# Altium PCB ART_CARD Rev 5.PcbDoc (part 2 of 13)
Units mil, origin at the board's own origin, x right, y up, seen from the top; angles counter-clockwise.
Board outline 6600.39 x 3903.54 mil, 8 copper layers (Top, Inner Layer 2, Inner Layer 3, Inner Layer 4, Inner Layer 5, Inner Layer 6, Inner Layer 7, Bottom), stack 63.111 mil thick; 542 components, 382 nets, 2410 pads, 1433 vias.
Unrouted connection lines stored in the file: 1247.
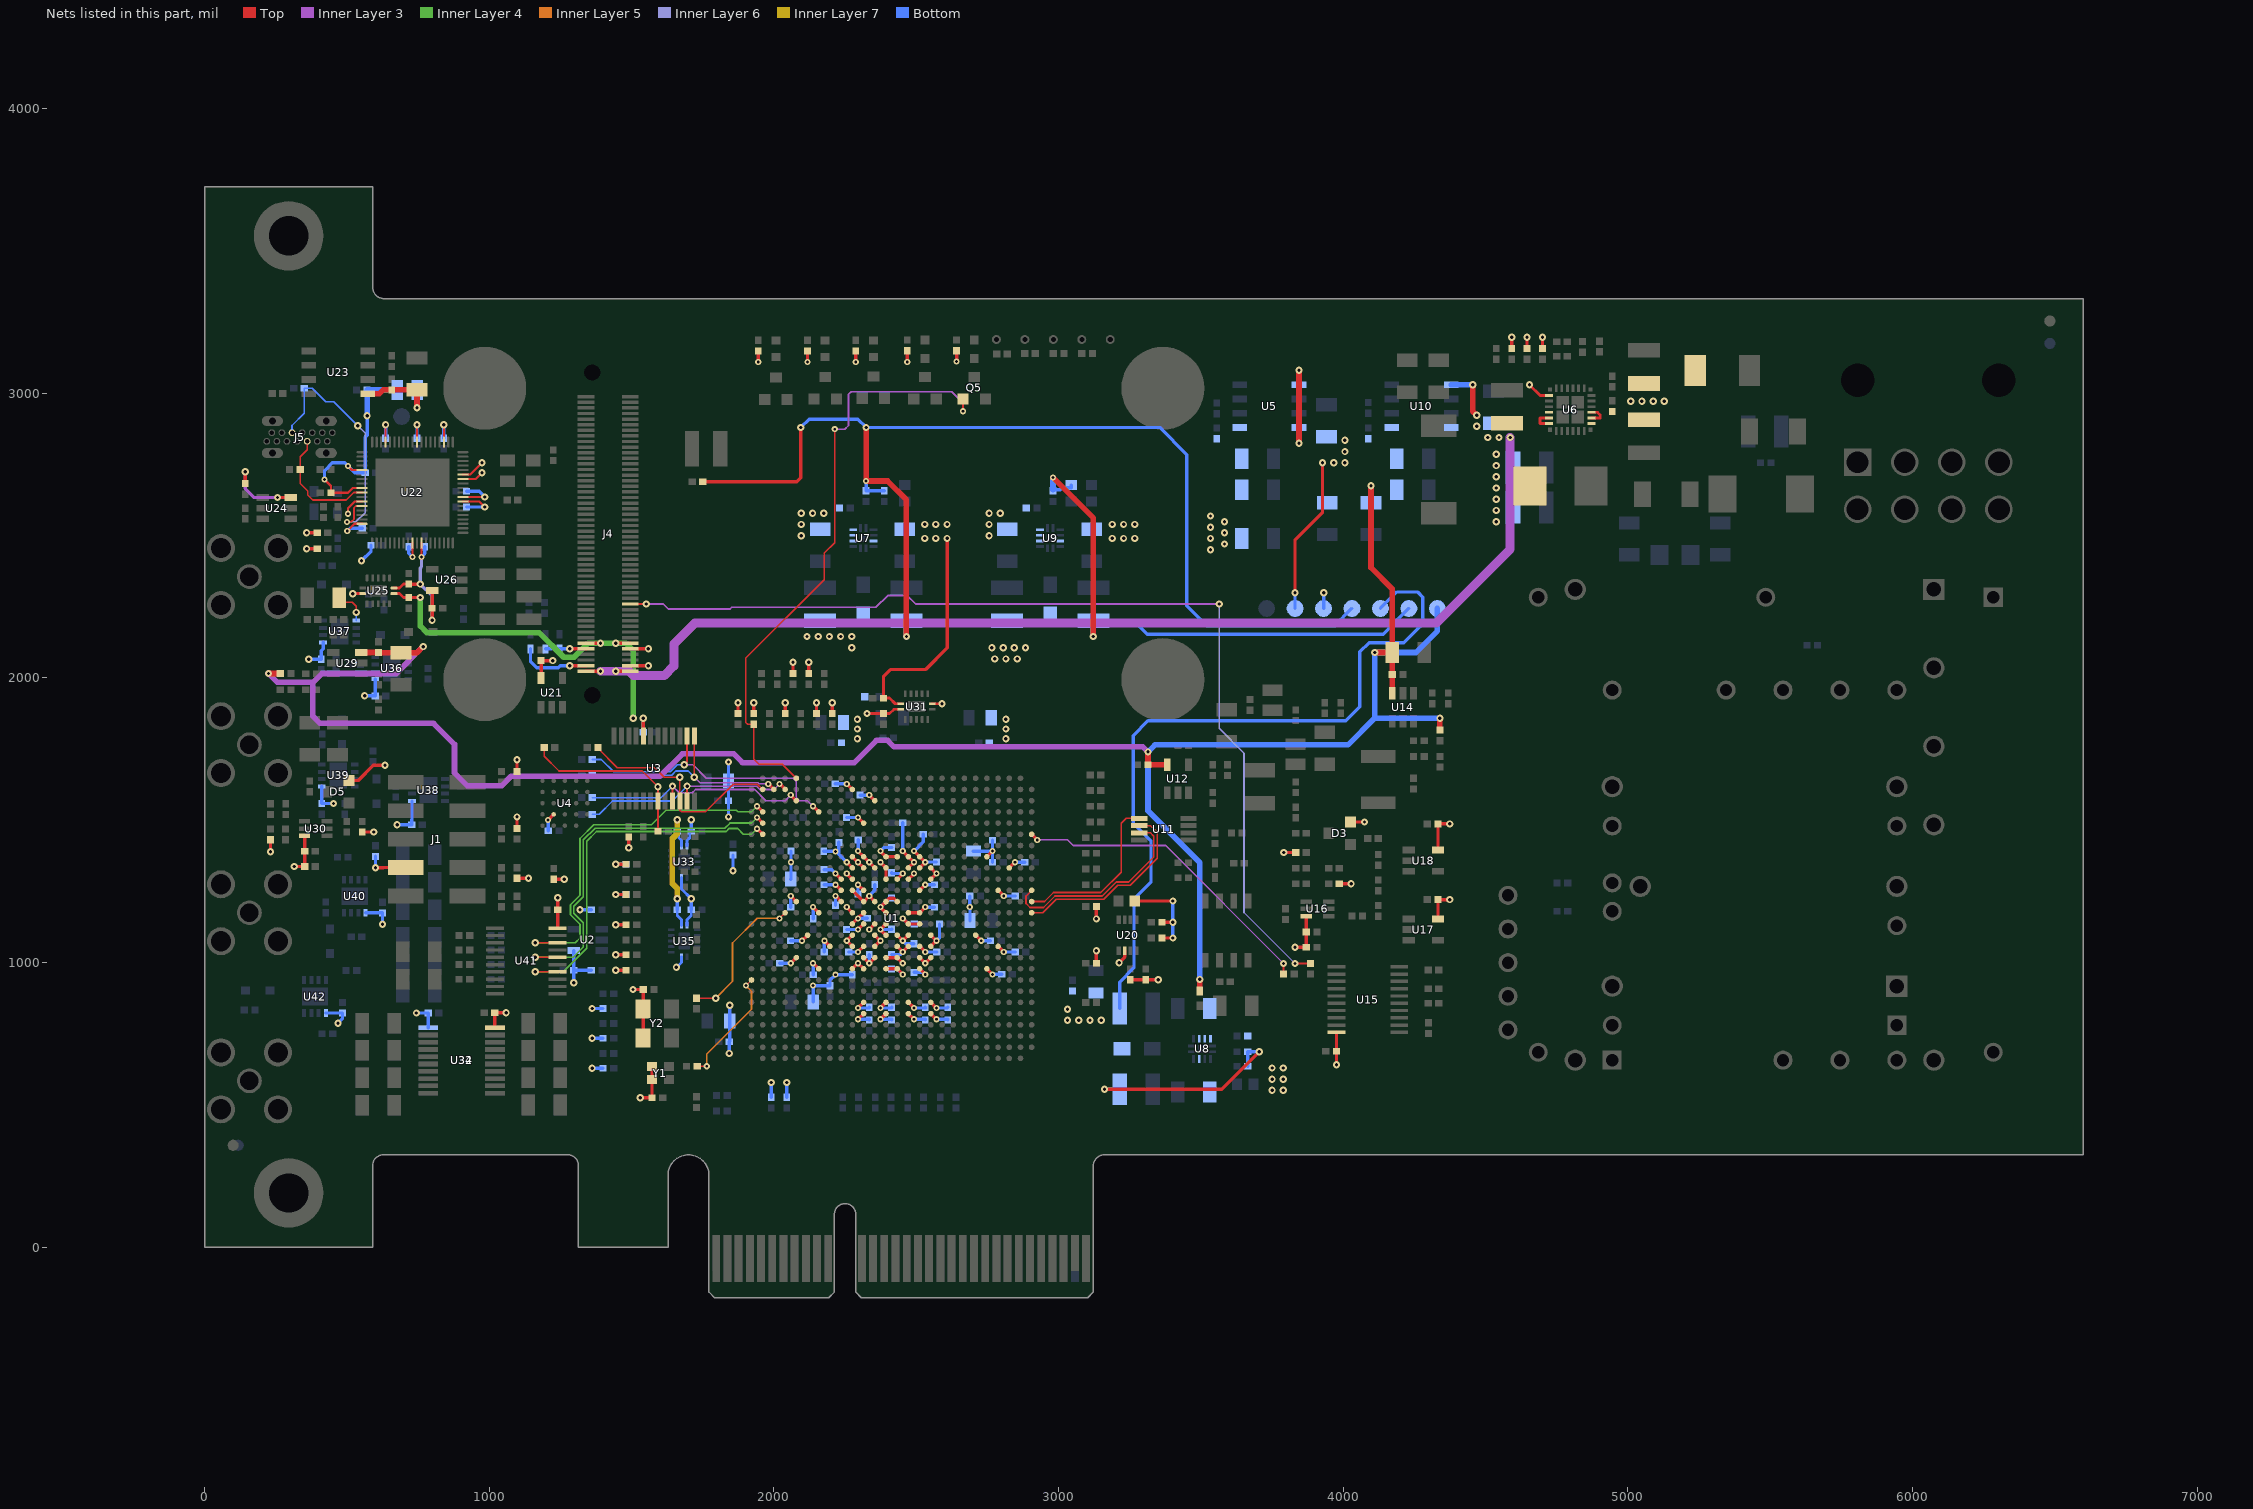
[diagram p8: the nets of this part, all layers, seen from the top]

## Footprints (in the part's own frame and the unit in brackets; to place one, negate y for a bottom-side part, rotate by r counter-clockwise, add the part's x,y. Pads: shape width x height; smd on the part's side, far side on the other; paste and mask are expansions set on the pad) (continued)
MIRE-ACT [mm]
  round 1 smd mask+0.75: 1(0,0)
  Top keep-out region: 1.5,0 1.386,0.574 1.061,1.061 0.574,1.386 0,1.5 0,1.5 -0.574,1.386 -1.061,1.061 -1.386,0.574 -1.5,0 -1.5,0 -1.386,-0.574 -1.061,-1.061 -0.574,-1.386 0,-1.5 0,-1.5 0.574,-1.386 1.061,-1.061 1.386,-0.574 1.5,0
PT-SINGLE-SIDE-0.45 [mm]
  round 0.8 hole 0.45 mask+0.05: 1(0,0)
PT-SINGLE-SIDE-1.5 [mm]
  round 1.5 smd mask+0.05: 1(0,0)
  silkscreen extent -0.95,-0.95 0.95,0.95
Q-SOT23-6R [mm]
  rect 0.6x1.1 smd paste-0.05 mask+0.05: 1(0.95,1.25) 2(0,1.25) 3(-0.95,1.25) 4(-0.95,-1.25) 5(0,-1.25) 6(0.95,-1.25)
  silkscreen extent -1.55,-0.87 1.95,1.7
Q-SOT23-6RA [mm]
  rect 0.6x1.1 smd paste-0.05 mask+0.05: 1(0.95,1.25) 2(0,1.25) 3(-0.95,1.25) 4(-0.95,-1.25) 5(0,-1.25) 6(0.95,-1.25)
  silkscreen extent -1.55,-0.87 1.55,2.45
R-0402R [mm]
  rect 0.65x0.6 smd paste-0.05 mask+0.05: 1(-0.475,0) 2(0.475,0)
  silkscreen extent -0.7,-0.6 0.7,0.6
R-0603R [mm]
  rect 0.9x1 smd paste-0.05 mask+0.05: 1(-0.725,0) 2(0.725,0)
  silkscreen extent -1.5,-0.8 1.5,0.8
R-1206R [mm]
  rect 1.2x1.85 smd paste-0.05 mask+0.05: 1(-1.425,0) 2(1.425,0)
  silkscreen extent -2.25,-1.15 2.25,1.15
TMR-D3.5-P6.2 [mm]
  round 6.2 / inner round 4.2 / far side round 6.2 hole 3.5 mask+0.1: 1(0,0)
U-FAIRCHILD-TSSOP20-R [mm]
  rect 0.42x1.78 smd paste-0.05 mask+0.05: 1(-2.925,-2.97) 2(-2.275,-2.97) 3(-1.625,-2.97) 4(-0.975,-2.97) 5(-0.325,-2.97) 6(0.325,-2.97) 7(0.975,-2.97) 8(1.625,-2.97) 9(2.275,-2.97) 10(2.925,-2.97) 11(2.925,2.97) 12(2.275,2.97) 13(1.625,2.97) 14(0.975,2.97) 15(0.325,2.97) 16(-0.325,2.97) 17(-0.975,2.97) 18(-1.625,2.97) 19(-2.275,2.97) 20(-2.925,2.97)
  silkscreen extent -3.25,-1.8 3.25,1.8
U-FBGA672-27X27MM-P1MM [mm]
  round 0.5 smd paste-0.05 mask+0.05: A2(-11.5,12.5) A3(-10.5,12.5) A4(-9.5,12.5) A5(-8.5,12.5) A6(-7.5,12.5) A7(-6.5,12.5) A8(-5.5,12.5) A9(-4.5,12.5) A10(-3.5,12.5) A11(-2.5,12.5) A12(-1.5,12.5) A13(-0.5,12.5) A14(0.5,12.5) A15(1.5,12.5) A16(2.5,12.5) A17(3.5,12.5) A18(4.5,12.5) A19(5.5,12.5) A20(6.5,12.5) A21(7.5,12.5) A22(8.5,12.5) A23(9.5,12.5) A24(10.5,12.5) A25(11.5,12.5) AA1(-12.5,-7.5) AA2(-11.5,-7.5) AA3(-10.5,-7.5) AA4(-9.5,-7.5) AA5(-8.5,-7.5) AA6(-7.5,-7.5) AA7(-6.5,-7.5) AA8(-5.5,-7.5) AA9(-4.5,-7.5) AA10(-3.5,-7.5) AA11(-2.5,-7.5) AA12(-1.5,-7.5) AA13(-0.5,-7.5) AA14(0.5,-7.5) AA15(1.5,-7.5) AA16(2.5,-7.5) AA17(3.5,-7.5) AA18(4.5,-7.5) AA19(5.5,-7.5) AA20(6.5,-7.5) AA21(7.5,-7.5) AA22(8.5,-7.5) AA23(9.5,-7.5) AA24(10.5,-7.5) AA25(11.5,-7.5) AA26(12.5,-7.5) AB1(-12.5,-8.5) AB2(-11.5,-8.5) AB3(-10.5,-8.5) AB4(-9.5,-8.5) AB5(-8.5,-8.5) AB6(-7.5,-8.5) AB7(-6.5,-8.5) AB8(-5.5,-8.5) AB9(-4.5,-8.5) AB10(-3.5,-8.5) AB11(-2.5,-8.5) AB12(-1.5,-8.5) AB13(-0.5,-8.5) AB14(0.5,-8.5) AB15(1.5,-8.5) AB16(2.5,-8.5) AB17(3.5,-8.5) AB18(4.5,-8.5) AB19(5.5,-8.5) AB20(6.5,-8.5) AB21(7.5,-8.5) AB22(8.5,-8.5) AB23(9.5,-8.5) AB24(10.5,-8.5) AB25(11.5,-8.5) AB26(12.5,-8.5) AC1(-12.5,-9.5) AC2(-11.5,-9.5) AC3(-10.5,-9.5) AC4(-9.5,-9.5) AC5(-8.5,-9.5) AC6(-7.5,-9.5) AC7(-6.5,-9.5) AC8(-5.5,-9.5) AC9(-4.5,-9.5) AC10(-3.5,-9.5) AC11(-2.5,-9.5) AC12(-1.5,-9.5) AC13(-0.5,-9.5) AC14(0.5,-9.5) AC15(1.5,-9.5) AC16(2.5,-9.5) AC17(3.5,-9.5) AC18(4.5,-9.5) AC19(5.5,-9.5) AC20(6.5,-9.5) AC21(7.5,-9.5) AC22(8.5,-9.5) AC23(9.5,-9.5) AC24(10.5,-9.5) AC25(11.5,-9.5) AC26(12.5,-9.5) AD1(-12.5,-10.5) AD2(-11.5,-10.5) AD3(-10.5,-10.5) AD4(-9.5,-10.5) AD5(-8.5,-10.5) AD6(-7.5,-10.5) AD7(-6.5,-10.5) AD8(-5.5,-10.5) AD9(-4.5,-10.5) AD10(-3.5,-10.5) AD11(-2.5,-10.5) AD12(-1.5,-10.5) AD13(-0.5,-10.5) AD14(0.5,-10.5) AD15(1.5,-10.5) AD16(2.5,-10.5) AD17(3.5,-10.5) AD18(4.5,-10.5) AD19(5.5,-10.5) AD20(6.5,-10.5) AD21(7.5,-10.5) AD22(8.5,-10.5) AD23(9.5,-10.5) AD24(10.5,-10.5) AD25(11.5,-10.5) AD26(12.5,-10.5) AE1(-12.5,-11.5) AE2(-11.5,-11.5) AE3(-10.5,-11.5) AE4(-9.5,-11.5) AE5(-8.5,-11.5) AE6(-7.5,-11.5) AE7(-6.5,-11.5) AE8(-5.5,-11.5) AE9(-4.5,-11.5) AE10(-3.5,-11.5) AE11(-2.5,-11.5) AE12(-1.5,-11.5) AE13(-0.5,-11.5) AE14(0.5,-11.5) AE15(1.5,-11.5) AE16(2.5,-11.5) AE17(3.5,-11.5) AE18(4.5,-11.5) AE19(5.5,-11.5) AE20(6.5,-11.5) AE21(7.5,-11.5) AE22(8.5,-11.5) AE23(9.5,-11.5) AE24(10.5,-11.5) AE25(11.5,-11.5) AE26(12.5,-11.5) AF2(-11.5,-12.5) AF3(-10.5,-12.5) AF4(-9.5,-12.5) AF5(-8.5,-12.5) AF6(-7.5,-12.5) AF7(-6.5,-12.5) AF8(-5.5,-12.5) AF9(-4.5,-12.5) AF10(-3.5,-12.5) AF11(-2.5,-12.5) AF12(-1.5,-12.5) AF13(-0.5,-12.5) AF14(0.5,-12.5) AF15(1.5,-12.5) AF16(2.5,-12.5) AF17(3.5,-12.5) AF18(4.5,-12.5) AF19(5.5,-12.5) AF20(6.5,-12.5) AF21(7.5,-12.5) AF22(8.5,-12.5) AF23(9.5,-12.5) AF24(10.5,-12.5) AF25(11.5,-12.5) B1(-12.5,11.5) B2(-11.5,11.5) B3(-10.5,11.5) B4(-9.5,11.5) B5(-8.5,11.5) B6(-7.5,11.5) B7(-6.5,11.5) B8(-5.5,11.5) B9(-4.5,11.5) B10(-3.5,11.5) B11(-2.5,11.5) B12(-1.5,11.5) B13(-0.5,11.5) B14(0.5,11.5) B15(1.5,11.5) B16(2.5,11.5) B17(3.5,11.5) B18(4.5,11.5) B19(5.5,11.5) B20(6.5,11.5) B21(7.5,11.5) B22(8.5,11.5) B23(9.5,11.5) B24(10.5,11.5) B25(11.5,11.5) B26(12.5,11.5) C1(-12.5,10.5) C2(-11.5,10.5) C3(-10.5,10.5) C4(-9.5,10.5) C5(-8.5,10.5) C6(-7.5,10.5) C7(-6.5,10.5) C8(-5.5,10.5) C9(-4.5,10.5) C10(-3.5,10.5) C11(-2.5,10.5) C12(-1.5,10.5) C13(-0.5,10.5) C14(0.5,10.5) C15(1.5,10.5) C16(2.5,10.5) C17(3.5,10.5) C18(4.5,10.5) C19(5.5,10.5) C20(6.5,10.5) C21(7.5,10.5) C22(8.5,10.5) C23(9.5,10.5) C24(10.5,10.5) C25(11.5,10.5) C26(12.5,10.5) D1(-12.5,9.5) D2(-11.5,9.5) D3(-10.5,9.5) D4(-9.5,9.5) D5(-8.5,9.5) D6(-7.5,9.5) D7(-6.5,9.5) D8(-5.5,9.5) D9(-4.5,9.5) D10(-3.5,9.5) D11(-2.5,9.5) D12(-1.5,9.5) D13(-0.5,9.5) D14(0.5,9.5) D15(1.5,9.5) D16(2.5,9.5) D17(3.5,9.5) D18(4.5,9.5) D19(5.5,9.5) D20(6.5,9.5) D21(7.5,9.5) D22(8.5,9.5) D23(9.5,9.5) D24(10.5,9.5) D25(11.5,9.5) D26(12.5,9.5) E1(-12.5,8.5) E2(-11.5,8.5) E3(-10.5,8.5) E4(-9.5,8.5) E5(-8.5,8.5) E6(-7.5,8.5) E7(-6.5,8.5) E8(-5.5,8.5) E9(-4.5,8.5) E10(-3.5,8.5) E11(-2.5,8.5) E12(-1.5,8.5) E13(-0.5,8.5) E14(0.5,8.5) E15(1.5,8.5) E16(2.5,8.5) E17(3.5,8.5) E18(4.5,8.5) E19(5.5,8.5) E20(6.5,8.5) E21(7.5,8.5) E22(8.5,8.5) E23(9.5,8.5) E24(10.5,8.5) E25(11.5,8.5) E26(12.5,8.5) F1(-12.5,7.5) F2(-11.5,7.5) F3(-10.5,7.5) F4(-9.5,7.5) F5(-8.5,7.5) F6(-7.5,7.5) F7(-6.5,7.5) F8(-5.5,7.5) F9(-4.5,7.5) F10(-3.5,7.5) F11(-2.5,7.5) F12(-1.5,7.5) F13(-0.5,7.5) F14(0.5,7.5) F15(1.5,7.5) F16(2.5,7.5) F17(3.5,7.5) F18(4.5,7.5) F19(5.5,7.5) F20(6.5,7.5) F21(7.5,7.5) F22(8.5,7.5) F23(9.5,7.5) F24(10.5,7.5) F25(11.5,7.5) F26(12.5,7.5) G1(-12.5,6.5) G2(-11.5,6.5) G3(-10.5,6.5) G4(-9.5,6.5) G5(-8.5,6.5) G6(-7.5,6.5) G7(-6.5,6.5) G8(-5.5,6.5) G9(-4.5,6.5) G10(-3.5,6.5) G11(-2.5,6.5) G12(-1.5,6.5) G13(-0.5,6.5) G14(0.5,6.5) G15(1.5,6.5) G16(2.5,6.5) G17(3.5,6.5) G18(4.5,6.5) G19(5.5,6.5) G20(6.5,6.5) G21(7.5,6.5) G22(8.5,6.5) G23(9.5,6.5) G24(10.5,6.5) G25(11.5,6.5) G26(12.5,6.5) H1(-12.5,5.5) H2(-11.5,5.5) H3(-10.5,5.5) H4(-9.5,5.5) H5(-8.5,5.5) H6(-7.5,5.5) H7(-6.5,5.5) H8(-5.5,5.5) H9(-4.5,5.5) H10(-3.5,5.5) H11(-2.5,5.5) H12(-1.5,5.5) H13(-0.5,5.5) H14(0.5,5.5) H15(1.5,5.5) H16(2.5,5.5) H17(3.5,5.5) H18(4.5,5.5) H19(5.5,5.5) H20(6.5,5.5) H21(7.5,5.5) H22(8.5,5.5) H23(9.5,5.5) H24(10.5,5.5) H25(11.5,5.5) H26(12.5,5.5) J1(-12.5,4.5) J2(-11.5,4.5) J3(-10.5,4.5) J4(-9.5,4.5) J5(-8.5,4.5) J6(-7.5,4.5) J7(-6.5,4.5) J8(-5.5,4.5) J9(-4.5,4.5) J10(-3.5,4.5) J11(-2.5,4.5) J12(-1.5,4.5) J13(-0.5,4.5) J14(0.5,4.5) J15(1.5,4.5) J16(2.5,4.5) J17(3.5,4.5) J18(4.5,4.5) J19(5.5,4.5) J20(6.5,4.5) J21(7.5,4.5) J22(8.5,4.5) J23(9.5,4.5) J24(10.5,4.5) J25(11.5,4.5) J26(12.5,4.5) K1(-12.5,3.5) K2(-11.5,3.5) K3(-10.5,3.5) K4(-9.5,3.5) K5(-8.5,3.5) K6(-7.5,3.5) K7(-6.5,3.5) K8(-5.5,3.5) K9(-4.5,3.5) K10(-3.5,3.5) K11(-2.5,3.5) K12(-1.5,3.5) K13(-0.5,3.5) K14(0.5,3.5) K15(1.5,3.5) K16(2.5,3.5) K17(3.5,3.5) K18(4.5,3.5) K19(5.5,3.5) K20(6.5,3.5) K21(7.5,3.5) K22(8.5,3.5) K23(9.5,3.5) K24(10.5,3.5) K25(11.5,3.5) K26(12.5,3.5) L1(-12.5,2.5) L2(-11.5,2.5) L3(-10.5,2.5) L4(-9.5,2.5) L5(-8.5,2.5) L6(-7.5,2.5) L7(-6.5,2.5) L8(-5.5,2.5) L9(-4.5,2.5) L10(-3.5,2.5) L11(-2.5,2.5) L12(-1.5,2.5) L13(-0.5,2.5) L14(0.5,2.5) L15(1.5,2.5) L16(2.5,2.5) L17(3.5,2.5) L18(4.5,2.5) L19(5.5,2.5) L20(6.5,2.5) L21(7.5,2.5) L22(8.5,2.5) L23(9.5,2.5) L24(10.5,2.5) L25(11.5,2.5) L26(12.5,2.5) M1(-12.5,1.5) M2(-11.5,1.5) M3(-10.5,1.5) M4(-9.5,1.5) M5(-8.5,1.5) M6(-7.5,1.5) M7(-6.5,1.5) M8(-5.5,1.5) M9(-4.5,1.5) M10(-3.5,1.5) M11(-2.5,1.5) M12(-1.5,1.5) M13(-0.5,1.5) M14(0.5,1.5) M15(1.5,1.5) M16(2.5,1.5) M17(3.5,1.5) M18(4.5,1.5) M19(5.5,1.5) M20(6.5,1.5) M21(7.5,1.5) M22(8.5,1.5) M23(9.5,1.5) M24(10.5,1.5) M25(11.5,1.5) M26(12.5,1.5) N1(-12.5,0.5) N2(-11.5,0.5) N3(-10.5,0.5) N4(-9.5,0.5) N5(-8.5,0.5) N6(-7.5,0.5) N7(-6.5,0.5) N8(-5.5,0.5) N9(-4.5,0.5) N10(-3.5,0.5) N11(-2.5,0.5) N12(-1.5,0.5) N13(-0.5,0.5) N14(0.5,0.5) N15(1.5,0.5) N16(2.5,0.5) N17(3.5,0.5) N18(4.5,0.5) N19(5.5,0.5) N20(6.5,0.5) N21(7.5,0.5) N22(8.5,0.5) N23(9.5,0.5) N24(10.5,0.5) N25(11.5,0.5) N26(12.5,0.5) P1(-12.5,-0.5) P2(-11.5,-0.5) P3(-10.5,-0.5) P4(-9.5,-0.5) P5(-8.5,-0.5) P6(-7.5,-0.5) P7(-6.5,-0.5) P8(-5.5,-0.5) P9(-4.5,-0.5) P10(-3.5,-0.5) P11(-2.5,-0.5) P12(-1.5,-0.5) P13(-0.5,-0.5) P14(0.5,-0.5) P15(1.5,-0.5) P16(2.5,-0.5) P17(3.5,-0.5) P18(4.5,-0.5) P19(5.5,-0.5) P20(6.5,-0.5) P21(7.5,-0.5) P22(8.5,-0.5) P23(9.5,-0.5) P24(10.5,-0.5) P25(11.5,-0.5) P26(12.5,-0.5) R1(-12.5,-1.5) R2(-11.5,-1.5) R3(-10.5,-1.5) R4(-9.5,-1.5) R5(-8.5,-1.5) R6(-7.5,-1.5) R7(-6.5,-1.5) R8(-5.5,-1.5) R9(-4.5,-1.5) R10(-3.5,-1.5) R11(-2.5,-1.5) R12(-1.5,-1.5) R13(-0.5,-1.5) R14(0.5,-1.5) R15(1.5,-1.5) R16(2.5,-1.5) R17(3.5,-1.5) R18(4.5,-1.5) R19(5.5,-1.5) R20(6.5,-1.5) R21(7.5,-1.5) R22(8.5,-1.5) R23(9.5,-1.5) R24(10.5,-1.5) R25(11.5,-1.5) R26(12.5,-1.5) T1(-12.5,-2.5) T2(-11.5,-2.5) T3(-10.5,-2.5) T4(-9.5,-2.5) T5(-8.5,-2.5) T6(-7.5,-2.5) T7(-6.5,-2.5) T8(-5.5,-2.5) T9(-4.5,-2.5) T10(-3.5,-2.5) T11(-2.5,-2.5) T12(-1.5,-2.5) T13(-0.5,-2.5) T14(0.5,-2.5) T15(1.5,-2.5) T16(2.5,-2.5) T17(3.5,-2.5) T18(4.5,-2.5) T19(5.5,-2.5) T20(6.5,-2.5) T21(7.5,-2.5) T22(8.5,-2.5) T23(9.5,-2.5) T24(10.5,-2.5) T25(11.5,-2.5) T26(12.5,-2.5) U1(-12.5,-3.5) U2(-11.5,-3.5) U3(-10.5,-3.5) U4(-9.5,-3.5) U5(-8.5,-3.5) U6(-7.5,-3.5) U7(-6.5,-3.5) U8(-5.5,-3.5) U9(-4.5,-3.5) U10(-3.5,-3.5) U11(-2.5,-3.5) U12(-1.5,-3.5) U13(-0.5,-3.5) U14(0.5,-3.5) U15(1.5,-3.5) U16(2.5,-3.5) U17(3.5,-3.5) U18(4.5,-3.5) U19(5.5,-3.5) U20(6.5,-3.5) U21(7.5,-3.5) U22(8.5,-3.5) U23(9.5,-3.5) U24(10.5,-3.5) U25(11.5,-3.5) U26(12.5,-3.5) V1(-12.5,-4.5) V2(-11.5,-4.5) V3(-10.5,-4.5) V4(-9.5,-4.5) V5(-8.5,-4.5) V6(-7.5,-4.5) V7(-6.5,-4.5) V8(-5.5,-4.5) V9(-4.5,-4.5) V10(-3.5,-4.5) V11(-2.5,-4.5) V12(-1.5,-4.5) V13(-0.5,-4.5) V14(0.5,-4.5) V15(1.5,-4.5) V16(2.5,-4.5) V17(3.5,-4.5) V18(4.5,-4.5) V19(5.5,-4.5) V20(6.5,-4.5) V21(7.5,-4.5) V22(8.5,-4.5) V23(9.5,-4.5) V24(10.5,-4.5) V25(11.5,-4.5) V26(12.5,-4.5) W1(-12.5,-5.5) W2(-11.5,-5.5) W3(-10.5,-5.5) W4(-9.5,-5.5) W5(-8.5,-5.5) W6(-7.5,-5.5) W7(-6.5,-5.5) W8(-5.5,-5.5) W9(-4.5,-5.5) W10(-3.5,-5.5) W11(-2.5,-5.5) W12(-1.5,-5.5) W13(-0.5,-5.5) W14(0.5,-5.5) W15(1.5,-5.5) W16(2.5,-5.5) W17(3.5,-5.5) W18(4.5,-5.5) W19(5.5,-5.5) W20(6.5,-5.5) W21(7.5,-5.5) W22(8.5,-5.5) W23(9.5,-5.5) W24(10.5,-5.5) W25(11.5,-5.5) W26(12.5,-5.5) Y1(-12.5,-6.5) Y2(-11.5,-6.5) Y3(-10.5,-6.5) Y4(-9.5,-6.5) Y5(-8.5,-6.5) Y6(-7.5,-6.5) Y7(-6.5,-6.5) Y8(-5.5,-6.5) Y9(-4.5,-6.5) Y10(-3.5,-6.5) Y11(-2.5,-6.5) Y12(-1.5,-6.5) Y13(-0.5,-6.5) Y14(0.5,-6.5) Y15(1.5,-6.5) Y16(2.5,-6.5) Y17(3.5,-6.5) Y18(4.5,-6.5) Y19(5.5,-6.5) Y20(6.5,-6.5) Y21(7.5,-6.5) Y22(8.5,-6.5) Y23(9.5,-6.5) Y24(10.5,-6.5) Y25(11.5,-6.5) Y26(12.5,-6.5)
  silkscreen extent -13.5,-13.5 13.5,13.5
U-FTDI-QFN76-9X9MM-P0.4MM [mm]
  oval 1x0.2 smd mask+0.05: 1(-4.5,3.6) 2(-4.5,3.2) 3(-4.5,2.8) 4(-4.5,2.4) 5(-4.5,2) 6(-4.5,1.6) 7(-4.5,1.2) 8(-4.5,0.8) 9(-4.5,0.4) 10(-4.5,0) 11(-4.5,-0.4) 12(-4.5,-0.8) 13(-4.5,-1.2) 14(-4.5,-1.6) 15(-4.5,-2) 16(-4.5,-2.4) 17(-4.5,-2.8) 18(-4.5,-3.2) 19(-4.5,-3.6) 39(4.5,-3.6) 40(4.5,-3.2) 41(4.5,-2.8) 42(4.5,-2.4) 43(4.5,-2) 44(4.5,-1.6) 45(4.5,-1.2) 46(4.5,-0.8) 47(4.5,-0.4) 48(4.5,0) 49(4.5,0.4) 50(4.5,0.8) 51(4.5,1.2) 52(4.5,1.6) 53(4.5,2) 54(4.5,2.4) 55(4.5,2.8) 56(4.5,3.2) 57(4.5,3.6)
  oval 0.2x1 smd mask+0.05: 20(-3.6,-4.5) 21(-3.2,-4.5) 22(-2.8,-4.5) 23(-2.4,-4.5) 24(-2,-4.5) 25(-1.6,-4.5) 26(-1.2,-4.5) 27(-0.8,-4.5) 28(-0.4,-4.5) 29(0,-4.5) 30(0.4,-4.5) 31(0.8,-4.5) 32(1.2,-4.5) 33(1.6,-4.5) 34(2,-4.5) 35(2.4,-4.5) 36(2.8,-4.5) 37(3.2,-4.5) 38(3.6,-4.5) 58(3.6,4.5) 59(3.2,4.5) 60(2.8,4.5) 61(2.4,4.5) 62(2,4.5) 63(1.6,4.5) 64(1.2,4.5) 65(0.8,4.5) 66(0.4,4.5) 67(0,4.5) 68(-0.4,4.5) 69(-0.8,4.5) 70(-1.2,4.5) 71(-1.6,4.5) 72(-2,4.5) 73(-2.4,4.5) 74(-2.8,4.5) 75(-3.2,4.5) 76(-3.6,4.5)
  rect 6.1x6.6 smd mask+0.05: 77(0,0)
  silkscreen extent -4.55,-4.55 4.55,4.55
U-LQFN12-2X2MM [mm]
  rect 0.7x0.25 smd paste-0.025 mask+0.05: 1(-0.9,0.75) 2(-0.9,0.25) 3(-0.9,-0.25) 4(-0.9,-0.75) 7(0.9,-0.75) 8(0.9,-0.25) 9(0.9,0.25) 10(0.9,0.75)
  rect 0.25x0.7 smd paste-0.025 mask+0.05: 5(-0.25,-0.9) 6(0.25,-0.9) 11(0.25,0.9) 12(-0.25,0.9)
  rect 0.7x0.7 smd paste-0.05 mask+0.05: 13(0,0)
  silkscreen extent -1.27,-1.1 1,1.35
U-LQFN24-4.5X4.5MM [mm]
  rect 0.7x0.25 smd paste-0.025 mask+0.05: 1(-1.9,1.25) 2(-1.9,0.75) 3(-1.9,0.25) 4(-1.9,-0.25) 5(-1.9,-0.75) 6(-1.9,-1.25) 13(1.9,-1.25) 14(1.9,-0.75) 15(1.9,-0.25) 16(1.9,0.25) 17(1.9,0.75) 18(1.9,1.25)
  rect 0.25x0.7 smd paste-0.025 mask+0.05: 7(-1.25,-1.9) 8(-0.75,-1.9) 9(-0.25,-1.9) 10(0.25,-1.9) 11(0.75,-1.9) 12(1.25,-1.9) 19(1.25,1.9) 20(0.75,1.9) 21(0.25,1.9) 22(-0.25,1.9) 23(-0.75,1.9) 24(-1.25,1.9)
  rect 1.125x1.125 smd paste-0.05 mask+0.05: 25(-0.663,0.663) 26(-0.663,-0.663) 27(0.663,-0.663) 28(0.663,0.663)
  rect 0.375x0.375 smd paste-0.05 mask+0.05: 29(-1.8,-1.8) 30(1.8,-1.8) 31(1.8,1.8) 32(-1.8,1.8)
  silkscreen extent -3.15,-2.55 2.55,2.55
U-MAXIM-TDFN8R-3X3MM [mm]
  rect 0.35x0.7 smd paste-0.05 mask+0.05: 1(-0.975,-1.475) 2(-0.325,-1.475) 3(0.325,-1.475) 4(0.975,-1.475) 5(0.975,1.475) 6(0.325,1.475) 7(-0.325,1.475) 8(-0.975,1.475)
  rect 2.35x1.58 smd paste-0.05 mask+0.05: 9(0,0)
  silkscreen extent -1.55,-2 1.55,2
U-MICRON-T-PBGA-24B05-6X8X1.2MM-P1MM [mm]
  round 0.4 smd paste-0.05 mask+0.05: A2(-1,2) A3(0,2) A4(1,2) A5(2,2) B1(-2,1) B2(-1,1) B3(0,1) B4(1,1) B5(2,1) C1(-2,0) C2(-1,0) C3(0,0) C4(1,0) C5(2,0) D1(-2,-1) D2(-1,-1) D3(0,-1) D4(1,-1) D5(2,-1) E1(-2,-2) E2(-1,-2) E3(0,-2) E4(1,-2) E5(2,-2)
  silkscreen extent -3.05,-4.05 3.05,4.05
U-NXP-VSSOP8-0_5MM [mm]
  rect 0.4x0.75 smd paste-0.05 mask+0.05: 1(-0.8,-1.375) 4(0.8,-1.375) 5(0.8,1.375) 8(-0.8,1.375)
  rect 0.3x0.75 smd paste-0.05 mask+0.05: 2(-0.25,-1.375) 3(0.25,-1.375) 6(0.25,1.375) 7(-0.25,1.375)
  silkscreen extent -1.6,-1.5 1.05,0.8
U-SC70-6-R [mm]
  rect 1x0.4 smd paste-0.05 mask+0.05: 1(-1,0.65) 2(-1,0) 3(-1,-0.65) 4(1,-0.65) 5(1,0) 6(1,0.65)
  silkscreen extent -2.43,-1.1 1.8,1.1
U-SC70-6-RA [mm]
  rect 1x0.4 smd paste-0.05 mask+0.05: 1(-1,0.65) 2(-1,0) 3(-1,-0.65) 4(1,-0.65) 5(1,0) 6(1,0.65)
  silkscreen extent -2.18,-1.1 1.8,1.49
U-SO8R-A [mm]
  rect 0.6x1.3 smd paste-0.05 mask+0.05: 1(-1.905,-2.65) 2(-0.635,-2.65) 3(0.635,-2.65) 4(1.905,-2.65) 5(1.905,2.65) 6(0.635,2.65) 7(-0.635,2.65) 8(-1.905,2.65)
  silkscreen extent -2.54,-1.52 2.54,1.52
U-SOT23-5R [mm]
  rect 0.6x1.1 smd paste-0.05 mask+0.05: 1(0.95,1.25) 2(0,1.25) 3(-0.95,1.25) 4(-0.95,-1.25) 5(0.95,-1.25)
  silkscreen extent -1.55,-0.87 1.95,1.7
U-TEXAS-TSSOP20-PWP-R [mm]
  rect 0.3x1.6 smd paste-0.025 mask+0.05: 1(-2.925,-2.8) 2(-2.275,-2.8) 3(-1.625,-2.8) 4(-0.975,-2.8) 5(-0.325,-2.8) 6(0.325,-2.8) 7(0.975,-2.8) 8(1.625,-2.8) 9(2.275,-2.8) 10(2.925,-2.8) 11(2.925,2.8) 12(2.275,2.8) 13(1.625,2.8) 14(0.975,2.8) 15(0.325,2.8) 16(-0.325,2.8) 17(-0.975,2.8) 18(-1.625,2.8) 19(-2.275,2.8) 20(-2.925,2.8)
  silkscreen extent -4,-3.1 3.3,2.25
U-TI-SOT23-5R [mm]
  rect 0.6x1.1 smd paste-0.05 mask+0.05: 1(0.95,1.3) 2(0,1.3) 3(-0.95,1.3) 4(-0.95,-1.3) 5(0.95,-1.3)
  silkscreen extent -1.53,-0.87 1.95,1.7
U-TI-TSSOP24-R [mm]
  rect 0.45x1.5 smd paste-0.05 mask+0.05: 1(-3.575,-2.9) 2(-2.925,-2.9) 3(-2.275,-2.9) 4(-1.625,-2.9) 5(-0.975,-2.9) 6(-0.325,-2.9) 7(0.325,-2.9) 8(0.975,-2.9) 9(1.625,-2.9) 10(2.275,-2.9) 11(2.925,-2.9) 12(3.575,-2.9) 13(3.575,2.9) 14(2.925,2.9) 15(2.275,2.9) 16(1.625,2.9) 17(0.975,2.9) 18(0.325,2.9) 19(-0.325,2.9) 20(-0.975,2.9) 21(-1.625,2.9) 22(-2.275,2.9) 23(-2.925,2.9) 24(-3.575,2.9)
  silkscreen extent -4.89,-2.98 4.1,2.17
U-TI-WQFN14-P0.5MM [mm]
  rrect40% 0.25x0.6 smd mask+0.05: 1(-0.25,1.4) 7(-0.25,-1.4) 8(0.25,-1.4) 14(0.25,1.4)
  rrect40% 0.6x0.25 smd mask+0.05: 2(-1.15,1) 3(-1.15,0.5) 4(-1.15,0) 5(-1.15,-0.5) 6(-1.15,-1) 9(1.15,-1) 10(1.15,-0.5) 11(1.15,0) 12(1.15,0.5) 13(1.15,1)
  rrect10% 1x1.5 smd paste-0.06 mask+0.05: PAD(0,0)
  silkscreen extent -1.3,-1.55 1.3,2.2
U-TI-WQFN14-P0.5MMA [mm]
  rrect40% 0.25x0.6 smd mask+0.05: 1(-0.25,1.4) 7(-0.25,-1.4) 8(0.25,-1.4) 14(0.25,1.4)
  rrect40% 0.6x0.25 smd mask+0.05: 2(-1.15,1) 3(-1.15,0.5) 4(-1.15,0) 5(-1.15,-0.5) 6(-1.15,-1) 9(1.15,-1) 10(1.15,-0.5) 11(1.15,0) 12(1.15,0.5) 13(1.15,1)
  rrect10% 1x1.5 smd paste-0.06 mask+0.05: PAD(0,0)
  silkscreen extent -1.3,-1.55 1.3,2.15
U-VSSOP8-0.65MM [mm]
  rect 0.44x1.45 smd paste-0.05 mask+0.05: 1(-0.975,-2.2) 2(-0.325,-2.2) 3(0.325,-2.2) 4(0.975,-2.2) 5(0.975,2.2) 6(0.325,2.2) 7(-0.325,2.2) 8(-0.975,2.2)
  silkscreen extent -2.17,-2.62 1.55,1.55
Y-KYOCERA-CX3225SB [mm]
  rect 1.3x1.05 smd paste-0.05 mask+0.05: 1(-1.15,-0.925) 2(1.15,-0.925) 3(1.15,0.925) 4(-1.15,0.925)
  silkscreen extent -2.05,-1.7 2.05,1.7
Y-MICROSEMI-QUANTUM-SA_45S-CSAC [mm]
  rect 1.7x1.7 / inner rect 1.85x1.85 / far side rect 2.1x2.1 hole 1.1 mask+0.1: 1(-16.51,12.7)
  round 1.7 / inner round 1.85 / far side round 2.1 hole 1.1 mask+0.1: 4(-16.51,-2.54) 5(-16.51,-7.62) 6(-16.51,-12.7) 7(16.51,-12.7) 8(16.51,-7.62) 9(16.51,-2.54) 10(16.51,2.54) 12(16.51,12.7)
  silkscreen extent -24.13,-17.78 20.32,17.78
Y-RAKON-OCXO-ROX-3827-T2 [mm]
  rect 1.7x1.7 / inner rect 1.85x1.85 / far side rect 1.7x1.7 hole 1.1 mask+0.1: 1(-12.7,8.89)
  round 1.7 / inner round 1.85 / far side round 1.7 hole 1.1 mask+0.1: 2(-12.7,0) 3(-12.7,-8.89) 4(12.7,-8.89) 5(12.7,8.89) D(12.7,-1.27) E(12.7,-3.81)
  silkscreen extent -19.05,-13.55 19.05,13.55
Y-RAKON-OCXO-ROX-5242-T1-EM [mm]
  rect 1.9x1.9 / inner rect 2.05x2.05 / far side rect 1.9x1.9 hole 1.3 mask+0.1: 1(21,-16)
  round 1.9 / inner round 2.05 / far side round 1.9 hole 1.3 mask+0.1: 2(0,-16) 3(-21,-16) 4(-21,16) 5(21,16) A(14,-16) B(7,-16)
  silkscreen extent -25.65,-20.65 25.65,20.65
Y-SI510-3.2X5-4PINS [mm]
  rect 1.35x1.7 smd paste-0.05 mask+0.05: 1(-1.27,-1.3) 2(1.27,-1.3) 3(1.27,1.3) 4(-1.27,1.3)
  silkscreen extent -3.18,-2.23 2.5,1.6
Y-SITIME-2X1_6MM [mm]
  rect 0.9x0.8 smd paste-0.05 mask+0.05: 1(-0.75,-0.6) 2(0.75,-0.6) 3(0.75,0.6) 4(-0.75,0.6)
  silkscreen extent -1.5,-1.3 1.5,1.3
Y-SPECTRACOM-XO00980M [mm]
  rect 1.9x1.9 / inner rect 2.05x2.05 / far side rect 1.9x1.9 hole 1.3 mask+0.1: 1(12.7,-8.9)
  round 1.9 / inner round 2.05 / far side round 1.9 hole 1.3 mask+0.1: 2(12.7,0) 3(12.7,8.9) 4(-12.7,8.9) 5(-10.2,0) 6(-12.7,-8.9)
  silkscreen extent -18.05,-13.6 18.05,13.6
Y-SPECTRATIME-MRO-50 [mm]
  rect 1.7x1.7 / inner rect 1.85x1.85 / far side rect 2.1x2.1 hole 1.1 mask+0.1: 1(-21.3,-20.3)
  round 1.7 / inner round 1.85 / far side round 2.1 hole 1.1 mask+0.1: 2(-1,-20.3) 3(19.3,-20.3) 4(19.3,20.3) 5(-21.3,20.3) 6(22,18.3) 7(22,15.3) 8(22,12.3) 9(22,9.3) 10(22,6.3)
  silkscreen extent -25.6,-25.6 25.6,25.6

## Via types
v1: diameter 25.59, hole 11.81, Top to Bottom, 915 vias
v2: diameter 21.65, hole 9.84, Top to Bottom, 518 vias

## Nets (pads, with @x,y where several pads share a name; then routed paths per layer and width w, separated by ;. In a path a pad name is that pad's centre, name@x,y a point inside that pad or via, vN(x,y) a via of type N, cw(c..) or ccw(c..) an arc to the next point about the centre after c; other vN are vias at no path point)
0.9V: C1.1 C2.1 C3.1 C4.1 C5.1 C6.1 C7.1 C8.1 C9.1 C10.1 C11.1 C12.1 C13.1 C14.1 C15.1 C16.1 C17.1 C18.1 C19.1 C20.1 C21.1 C22.1 C23.1 C24.1 C25.1 C26.1 C27.1 C28.1 C29.1 C30.1 C109.1 C110.1 C111.1 L5.2 PD8.1 R78.1 U1.K9 U1.K10 U1.K15 U1.K16 U1.K17 U1.L8 U1.L9 U1.L13 U1.L14 U1.L17 U1.L18 U1.M8 U1.M9 U1.M10 U1.M13 U1.M14 U1.M15 U1.M16 U1.N8 U1.N10 U1.N12 U1.N15 U1.N16 U1.N17 U1.N18 U1.P8 U1.P9 U1.P10 U1.P12 U1.P13 U1.P14 U1.P15 U1.P17 U1.P18 U1.R9 U1.R12 U1.R14 U1.R15 U1.R16 U1.R17 U1.T8 U1.T9 U1.T12 U1.T13 U1.T14 U1.T17 U1.T18 U1.U8 U1.U9 U1.U10 U1.U11 U1.U13 U1.U14 U1.U15 U1.U16 U1.U18 | length 5155.7
  Top w11.81: v2(2255.91,1194.88) U1.U13@2275.59,1175.2 ; v2(2255.91,1312.99) U1.U10@2275.59,1293.31 ; v2(2255.91,1352.36) U1.U9@2275.59,1332.68 ; U1.U18@2275.59,978.35 v2(2295.28,998.03) U1.T18@2314.96,978.35 ; U1.U16@2275.59,1057.09 v2(2255.91,1076.77) U1.U15@2275.59,1096.46 ; U1.U14@2275.59,1135.83 v2(2295.28,1155.51) U1.T13@2314.96,1175.2 ; U1.U11@2275.59,1253.94 U1.T12@2314.96,1214.57 v2(2334.65,1234.25) U1.R12@2354.33,1214.57 ; U1.U8@2275.59,1372.05 v2(2295.28,1352.36) U1.T9@2314.96,1332.68 ; v2(2295.28,1116.14) U1.T14@2314.96,1135.83 ; v2(2295.28,1391.73) U1.T8@2314.96,1372.05 v2(2334.65,1352.36) U1.R9@2354.33,1332.68 ; U1.T17@2314.96,1017.72 v2(2334.65,998.03) U1.R17@2354.33,1017.72 ; v2(2334.65,1116.14) U1.R14@2354.33,1135.83 ; U1.R16@2354.33,1057.09 v2(2374.02,1076.77) U1.R15@2354.33,1096.46 ; v2(2374.02,1352.36) U1.P9@2393.7,1332.68 U1.P10@2393.7,1293.31 ; v2(2374.02,1391.73) U1.P8@2393.7,1372.05 U1.N8@2433.07,1372.05 ; U1.P18@2393.7,978.35 U1.N18@2433.07,978.35 v2(2452.76,958.66) ; U1.P17@2393.7,1017.72 U1.N17@2433.07,1017.72 v2(2452.76,998.03) ; U1.P15@2393.7,1096.46 v2(2374.02,1116.14) U1.P14@2393.7,1135.83 ; U1.P13@2393.7,1175.2 v2(2374.02,1194.88) U1.P12@2393.7,1214.57 2405.51,1226.38 2421.26,1226.38 U1.N12@2433.07,1214.57 ; U1.N16@2433.07,1057.09 v2(2452.76,1037.4) U1.M16@2472.44,1057.09 ; U1.N15@2433.07,1096.46 v2(2452.76,1076.77) U1.M15@2472.44,1096.46 ; U1.N10@2433.07,1293.31 v2(2452.76,1312.99) ; v2(2452.76,1155.51) U1.M14@2472.44,1135.83 U1.L14@2511.81,1135.83 ; v2(2452.76,1391.73) U1.M8@2472.44,1372.05 v2(2492.13,1352.36) U1.M9@2472.44,1332.68 ; U1.M13@2472.44,1175.2 U1.L13@2511.81,1175.2 v2(2531.5,1194.88) ; U1.M10@2472.44,1293.31 v2(2492.13,1312.99) ; v2(2492.13,1391.73) U1.L8@2511.81,1372.05 v2(2531.5,1352.36) U1.L9@2511.81,1332.68 ; U1.L18@2511.81,978.35 v2(2531.5,958.66) ; U1.L17@2511.81,1017.72 v2(2531.5,998.03) U1.K17@2551.18,1017.72 ; U1.K16@2551.18,1057.09 v2(2570.87,1076.77) U1.K15@2551.18,1096.46 ; U1.K10@2551.18,1293.31 v2(2570.87,1312.99) U1.K9@2551.18,1332.68
  Top w19.68: v2(2980.32,2703.74) 3122.05,2562.01 v1(3122.05,2145.67)
  Bottom w11.81: C14.1@2059.06,1293.31 2060.04,1294.29 v2(2060.04,1352.36) C24.1@2060.04,1391.73 ; C11.1@2137.8,862.2 v2(2137.8,919.29) 2193.9,919.29 2194.39,918.8 2196.36,918.8 C23.1@2196.85,918.31 2196.85,937.99 v2(2216.54,957.68) C8.1@2275.59,957.68 ; C18.1@2175.2,1390.75 v2(2216.54,1390.75) ; C15.1@2228.35,1422.24 2228.35,1379.92 v2(2255.91,1352.36) ; C16.1@2254.92,1116.14 v2(2295.28,1116.14) ; v2(2295.28,1155.51) C25.1@2327.76,1155.51 ; v2(2295.28,1391.73) 2296.26,1392.72 C3.1@2296.26,1431.1 ; v2(2334.65,998.03) C30.1@2334.65,1028.54 ; v2(2334.65,1234.25) 2354.33,1253.94 C5.1@2354.33,1274.61 ; v2(2374.02,1116.14) 2412.4,1116.14 C27.1@2413.39,1117.13 ; v2(2374.02,1194.88) 2406.5,1227.36 C22.1@2413.39,1227.36 ; v2(2374.02,1391.73) 2386.81,1404.53 C19.1@2413.39,1404.53 ; C1.1@2413.39,977.36 2434.06,977.36 v2(2452.76,958.66) ; C20.1@2413.39,1028.54 2443.9,1028.54 v2(2452.76,1037.4) ; C6.1@2413.39,1315.94 2413.39,1312.99 v2(2452.76,1312.99) ; v2(2452.76,1076.77) 2463.58,1065.94 C2.1@2492.13,1065.94 ; v2(2452.76,1155.51) 2472.44,1135.83 C21.1@2493.11,1135.83 ; v2(2452.76,1391.73) C26.1@2452.76,1491.14 ; C4.1@2492.13,965.55 2524.61,965.55 v2(2531.5,958.66) ; v2(2492.13,1391.73) 2524.61,1424.21 C10.1@2524.61,1450.79 ; v2(2531.5,1194.88) C7.1@2563.98,1194.88 ; v2(2531.5,1352.36) 2532.48,1353.35 C9.1@2570.87,1353.35 ; v2(2570.87,1076.77) 2581.69,1087.6 C28.1@2581.69,1135.83 ; C29.1@2687.99,1234.25 v2(2687.99,1194.88) 2688.98,1193.9 C12.1@2688.98,1147.64 ; C109.1@2980.32,2657.48 2980.32,2661.42 3005.91,2661.42 3012.8,2668.31 3044.29,2668.31 R78.1@3044.29,2677.17 ; C111.1@3122.05,2200.79 3264.76,2200.79 3312.01,2153.54 4140.16,2153.54 PD8.1@4230.71,2244.09
  Bottom w19.68: C109.1@2980.32,2661.42 v2(2980.32,2703.74) ; v1(3122.05,2145.67) C111.1@3122.05,2200.79
  other v1: 2814.96,1786.42 2814.96,1820.87 2814.96,1855.31 2775.59,2066.93 2814.96,2066.93 2854.33,2066.93 2765.75,2106.3 2805.12,2106.3 2844.49,2106.3 2883.86,2106.3
0.95V: C67.1 C68.1 C69.1 C70.1 C71.1 C72.1 C73.1 C74.1 C75.1 C76.1 C102.1 C105.1 C106.1 L4.2 PD7.1 R75.1 U1.K21 U1.K22 U1.M21 U1.M22 U1.P21 U1.P22 U1.T21 U1.T22 | length 3903.7
  Top w11.81: v2(2295.28,801.18) U1.T22@2314.96,820.87 ; v2(2295.28,840.55) U1.T21@2314.96,860.24 ; v2(2374.02,801.18) U1.P22@2393.7,820.87 ; v2(2374.02,840.55) U1.P21@2393.7,860.24 ; U1.M22@2472.44,820.87 v2(2492.13,801.18) ; U1.M21@2472.44,860.24 v2(2492.13,840.55) ; U1.K22@2551.18,820.87 v2(2570.87,801.18) ; U1.K21@2551.18,860.24 v2(2570.87,840.55) ; v1(3161.42,555.12) 3572.83,555.12 v1(3704.72,687.01)
  Bottom w11.81: v2(2295.28,801.18) 2334.65,801.18 C76.1@2334.65,798.23 ; v2(2295.28,840.55) 2334.65,840.55 C69.1@2334.65,843.5 ; v2(2374.02,801.18) 2413.39,801.18 C74.1@2413.39,798.23 ; v2(2374.02,840.55) 2413.39,840.55 C68.1@2413.39,843.5 ; v2(2492.13,801.18) 2531.5,801.18 C67.1@2531.5,798.23 ; v2(2492.13,840.55) 2534.45,840.55 C70.1@2531.5,843.5 ; v2(2570.87,801.18) 2610.24,801.18 C73.1@2610.24,798.23 ; v2(2570.87,840.55) 2607.28,840.55 C72.1@2610.24,843.5 ; v1(3161.42,555.12) C105.1@3214.57,555.12 ; C106.1@3214.57,838.58 3214.57,931.1 3264.76,981.3 3264.76,1223.43 3324.8,1283.46 3324.8,1426.18 3261.81,1489.17 3261.81,1797.24 3313.98,1849.41 4008.86,1849.41 4058.07,1898.62 4058.07,2091.54 4090.55,2124.02 4212.6,2124.02 4279.53,2190.94 4279.53,2283.46 4260.83,2302.17 4188.78,2302.17 PD7.1@4130.71,2244.09 ; R75.1@3664.37,635.83 C102.1@3664.37,687.01 v1(3704.72,687.01)
  other v1: 3031.5,797.24 3070.87,797.24 3110.24,797.24 3149.61,797.24 3031.5,836.61
1.2V_USB: C156.1 C157.1 C158.1 C159.1 U22.10 U22.27 U22.33 U22.47 U22.74 | length 551.2
  Top w7.87: v2(500.98,2515.75) 526.57,2541.34 U22.74@553.15,2541.34 ; v2(730.32,2425.2) U22.10@730.32,2474.41 ; U22.47@746.06,2828.74 v1(746.06,2889.76) ; U22.27@907.48,2620.08 964.57,2620.08 v1(984.25,2600.39) ; U22.33@907.48,2714.57 933.07,2714.57 v1(974.41,2755.91)
  Bottom w11.81: v2(500.98,2515.75) 510.83,2525.59 C159.1@554.13,2525.59 ; C157.1@717.52,2460.63 717.52,2437.99 v2(730.32,2425.2) ; C156.1@746.06,2842.52 v1(746.06,2889.76) ; C158.1@920.28,2600.39 v1(984.25,2600.39)
1.8V: C37.1 C38.1 C39.1 C40.1 C41.1 C42.1 C43.1 C44.1 C45.1 C46.1 C47.1 C48.1 C49.1 C50.1 C51.1 C52.1 C53.1 C54.1 C55.1 C56.1 C57.1 C58.1 C59.1 C60.1 C61.1 C62.1 C63.1 C64.1 C65.1 C66.1 C77.1 C80.1 C81.1 C84.1 C85.1 C86.1 C99.1 C100.1 C101.1 C139.1 C169.1 C188.1 C190.1 C197.1 C218.1 J1.4 J4.89 J4.90 L1.1 L3.2 PD6.1 R1.1 R2.1 R3.1 R4.1 R5.1 R8.1 R10.1 R11.1 R12.1 R16.1 R17.1 R18.1 R19.1 R20.1 R21.1 R22.1 R23.1 R32.1 R33.1 R34.1 R35.1 R36.1 R37.1 R38.1 R39.1 R49.1 R62.1 R72.1 R118.1 R119.1 R201.1 U1.AA15 U1.AB12 U1.AB17 U1.C9 U1.D11 U1.D16 U1.E8 U1.E18 U1.F15 U1.L11 U1.L16 U1.R3 U1.T5 U1.T11 U1.T16 U1.U2 U1.V10 U1.V11 U1.V12 U1.W16 U1.Y13 U1.Y18 U2.4 U3.8 U4.B4 U15.20 U20.2 U25.14 U31.1 U31.8 U33.1 U33.8 U35.1 U35.8 U41.20 Y1.1 Y1.4 Y2.1 Y2.4 | length 10113.2
  Top w9.84: U25.14@665.35,2296.26 685.04,2296.26 698.82,2282.48 C169.1@716.54,2282.48 ; C190.1@2384.84,1875 2406.5,1875 2421.26,1889.76 U31.1@2445.87,1889.76 ; U31.8@2556.1,1909.45 v1(2590.55,1909.45)
  Top w11.81: v1(600.39,1333.66) 627.95,1333.66 628.35,1334.06 J1.4@706.69,1334.06 ; C169.1@716.54,2282.48 C169.1@717.52,2282.48 v1(757.87,2282.48) ; R39.1@1097.44,1296.26 v1(1137.8,1296.26) ; R38.1@1097.44,1471.46 v1(1097.44,1511.81) ; R37.1@1097.44,1671.26 v1(1097.44,1712.6) ; v2(1206.69,1500.98) U4.B4@1226.38,1520.67 ; R62.1@1226.38,1293.31 v1(1263.78,1293.31) ; U41.20@1240.16,1121.06 C218.1@1240.16,1186.02 v1(1240.16,1228.35) ; J4.89@1339.57,2122.05 v1(1390.75,2122.05) ; v1(1443.9,973.43) R2.1@1480.32,973.43 ; v1(1443.9,1027.56) R19.1@1480.32,1027.56 ; v1(1443.9,1132.87) R1.1@1480.32,1132.87 ; v1(1443.9,1239.17) R20.1@1480.32,1239.17 ; v1(1443.9,1345.47) R22.1@1480.32,1345.47 ; v1(1443.9,2122.05) J4.90@1495.08,2122.05 ; v1(1490.16,1403.54) R49.1@1490.16,1440.94 ; v1(1504.92,905.51) C85.1@1541.34,905.51 1541.34,905.31 1540.55,904.53 Y2.4@1540.55,837.6 Y2.1@1540.55,735.24 ; v1(1530.51,525.59) C80.1@1571.85,525.59 Y1.1@1571.85,588.58 Y1.4@1571.85,635.83 ; U3.8@1541.34,1796.26 v1(1541.34,1858.27) ; R201.1@1750,2688.98 2079.72,2688.98 2094.49,2703.74 v1(2094.49,2879.92) ; R10.1@1874.02,1875 v1(1874.02,1913.39) ; R11.1@1929.13,1875 v1(1929.13,1913.39) ; R35.1@2039.37,1875 v1(2039.37,1913.39) ; v2(2059.06,998.03) U1.AB17@2078.74,1017.72 ; v2(2059.06,1234.25) U1.AB12@2078.74,1214.57 ; R34.1@2066.93,2015.75 v1(2066.93,2055.12) ; v2(2098.43,1076.77) U1.AA15@2118.11,1096.46 ; R12.1@2122.05,2015.75 v1(2122.05,2055.12) ; v2(2137.8,998.03) U1.Y18@2157.48,978.35 ; v2(2137.8,1194.88) U1.Y13@2157.48,1175.2 ; R36.1@2149.61,1875 v1(2149.61,1913.39) ; v2(2177.17,1076.77) U1.W16@2196.85,1057.09 ; R5.1@2204.72,1875 v1(2204.72,1913.39) ; v2(2216.54,1234.25) U1.V12@2236.22,1214.57 ; v2(2216.54,1273.62) U1.V11@2236.22,1253.94 ; v2(2216.54,1312.99) U1.V10@2236.22,1293.31 ; v2(2255.91,1627.95) U1.U2@2275.59,1608.27 ; v2(2295.28,1037.4) U1.T16@2314.96,1057.09 ; v2(2295.28,1273.62) U1.T11@2314.96,1253.94 ; v2(2295.28,1509.84) U1.T5@2314.96,1490.16 ; v1(2326.77,1875) C190.1@2384.84,1875 ; v2(2334.65,1588.58) U1.R3@2354.33,1568.9 ; U1.L16@2511.81,1057.09 v2(2531.5,1037.4) ; U1.L11@2511.81,1253.94 v2(2531.5,1273.62) ; U1.F15@2708.66,1096.46 v2(2728.35,1076.77) ; U1.E18@2748.03,978.35 v2(2767.72,958.66) ; U1.E8@2748.03,1372.05 v2(2767.72,1391.73) ; U1.D16@2787.4,1057.09 v2(2807.09,1037.4) ; U1.D11@2787.4,1253.94 v2(2807.09,1234.25) ; U1.C9@2826.77,1332.68 v2(2846.46,1352.36) ; R3.1@3132.87,998.03 v1(3132.87,1041.34) ; v1(3132.87,1153.54) R4.1@3132.87,1196.85 ; v1(3212.6,1000) 3232.28,1019.69 U20.2@3232.28,1042.32 ; R118.1@3251.97,939.96 R119.1@3306.1,939.96 v1(3350.39,939.96) ; v1(3976.38,640.75) C139.1@3976.38,688.98 U15.20@3976.38,754.92
  Top w19.68: v1(2323.82,2879.92) v2(2323.82,2691.93) 2399.61,2691.93 2465.55,2625.98 v1(2465.55,2145.67)
  Inner Layer 4 w19.68: v1(757.87,2282.48) 757.87,2182.09 780.51,2159.45 1175.2,2159.45 1261.81,2072.83 1298.23,2072.83 1347.44,2122.05 v1(1390.75,2122.05) v1(1443.9,2122.05) 1480.32,2122.05 1505.91,2096.46 v1(1505.91,1858.27)
  Bottom w9.84: v1(1657.48,983.27) 1675.2,1000.98 U35.8@1675.2,1020.67 ; U33.8@1675.2,1299.21 1675.2,1258.86 v1(1709.65,1224.41) ; U35.1@1694.88,1130.91 1694.88,1150.59 1709.65,1165.35 C197.1@1709.65,1186.02 ; U33.1@1694.88,1409.45 1694.88,1429.13 1704.23,1438.48 1704.23,1461.61 C188.1@1709.65,1461.61
  Bottom w11.81: v1(600.39,1333.66) C77.1@600.39,1373.03 ; v2(1206.69,1500.98) 1206.69,1464.57 C86.1@1207.68,1463.58 ; v1(1297.24,929.13) C81.1@1297.24,973.43 ; U2.4@1297.24,1042.32 C81.1@1297.24,973.43 ; v1(1318.9,1186.02) R32.1@1358.27,1186.02 ; R33.1@1358.27,973.43 C81.1@1297.24,973.43 ; v1(1361.22,628.94) R16.1@1399.61,628.94 ; v1(1361.22,734.25) R17.1@1399.61,734.25 ; v1(1361.22,838.58) R18.1@1399.61,838.58 ; v1(1443.9,1239.17) R21.1@1480.32,1239.17 ; v1(1443.9,1345.47) R23.1@1480.32,1345.47 ; C84.1@1541.34,1809.06 v1(1541.34,1858.27) ; C197.1@1709.65,1186.02 v1(1709.65,1224.41) ; C188.1@1709.65,1461.61 v1(1709.65,1501.97) ; v1(1840.55,1511.81) C51.1@1840.55,1568.9 C47.1@1840.55,1637.8 v1(1840.55,1704.72) ; v1(1843.5,681.1) C45.1@1843.5,722.44 1844.49,723.43 C50.1@1844.49,795.28 v1(1844.49,850.39) ; v1(1856.3,1322.83) R8.1@1856.3,1377.95 ; C56.1@2020.67,998.03 v2(2059.06,998.03) ; C63.1@2058.07,1076.77 v2(2098.43,1076.77) ; C53.1@2059.06,1194.88 v2(2059.06,1234.25) ; v1(2094.49,2879.92) 2124.02,2909.45 2294.29,2909.45 v1(2323.82,2879.92) 3355.32,2879.92 3450.79,2784.45 3450.79,2253.94 3520.87,2183.86 3970.47,2183.86 PD6.1@4030.71,2244.09 ; C52.1@2137.8,957.68 v2(2137.8,998.03) ; C59.1@2137.8,1154.53 v2(2137.8,1194.88) ; C58.1@2176.18,1273.62 v2(2216.54,1273.62) ; C64.1@2176.18,1326.77 2202.76,1326.77 v2(2216.54,1312.99) ; C44.1@2177.17,1037.4 v2(2177.17,1076.77) ; C38.1@2215.55,1627.95 v2(2255.91,1627.95) ; C41.1@2216.54,1201.77 v2(2216.54,1234.25) ; C61.1@2254.92,1509.84 v2(2295.28,1509.84) ; C39.1@2262.8,1037.4 v2(2295.28,1037.4) ; C54.1@2295.28,1241.14 v2(2295.28,1273.62) ; C65.1@2302.17,1588.58 v2(2334.65,1588.58) ; v2(2323.82,2691.93) C99.1@2323.82,2657.48 R72.1@2387.8,2657.48 ; v2(2531.5,1037.4) C40.1@2571.85,1037.4 ; v2(2531.5,1273.62) C60.1@2563.98,1273.62 ; C49.1@2700.79,1391.73 v2(2767.72,1391.73) ; v2(2728.35,1076.77) C46.1@2760.83,1076.77 ; v2(2767.72,958.66) C66.1@2800.2,958.66 ; C57.1@2767.72,1352.36 v2(2767.72,1391.73) ; C37.1@2767.72,1430.12 v2(2767.72,1391.73) ; v2(2807.09,1037.4) C62.1@2847.44,1037.4 ; v2(2807.09,1234.25) C43.1@2847.44,1234.25 ; v2(2846.46,1352.36) C42.1@2880.91,1352.36
  Bottom w19.68: v1(2465.55,2145.67) C101.1@2465.55,2200.79
  other v1: 2293.31,1786.42 2293.31,1820.87 2293.31,1855.31 2273.62,2106.3 2116.14,2145.67 2155.51,2145.67 2194.88,2145.67 2234.25,2145.67 2273.62,2145.67
3.3V: C88.1 C89.1 C140.1 C141.1 C144.1 C145.1 C148.1 C184.1 C185.1 C189.1 C198.1 C199.1 C200.1 C207.1 C208.1 C214.1 C219.1 D3.2 D5.2 J4.91 J4.92 L14.2 L16.2 PD5.1 R63.1 R83.1 R109.1 R110.1 R141.2 R144.2 R150.1 R151.2 R152.2 R154.2 R155.1 R156.1 R157.2 U5.1 U16.6 U17.5 U18.5 U21.5 U30.6 U33.14 U35.14 U36.1 U37.1 U38.1 U39.1 U40.1 U42.1 | length 2686.2
  Top w11.81: v1(231.3,1389.76) R155.1@231.3,1432.09 ; v1(314.96,1337.6) C184.1@351.38,1337.6 C185.1@351.38,1390.75 U30.6@351.38,1444.88 ; D5.2@506.89,1639.76 539.37,1639.76 592.52,1692.91 v1(633.86,1692.91) ; R156.1@554.13,1458.66 v1(594.49,1458.66) ; U21.5@1182.09,2000 C148.1@1182.09,2061.02 v1(1223.43,2061.02) ; v1(1282.48,2102.36) J4.91@1339.57,2102.36 ; J4.92@1495.08,2102.36 1535.43,2102.36 v1(1559.06,2102.36) ; v2(1944.88,3110.24) R141.2@1944.88,3148.62 ; v2(2118.11,3110.24) R144.2@2118.11,3148.62 ; v2(2287.4,3110.24) R152.2@2287.4,3148.62 ; v2(2468.5,3110.24) R154.2@2468.5,3149.61 ; v2(2641.73,3111.22) R157.2@2641.73,3149.61 ; v1(3791.34,1386.81) R109.1@3832.68,1386.81 ; v1(3830.71,1054.13) C140.1@3870.08,1054.13 C141.1@3870.08,1107.28 U16.6@3870.08,1163.39 ; R110.1@3986.22,1276.57 v1(4027.56,1276.57) ; D3.2@4025.59,1494.09 v1(4074.8,1494.09) ; U17.5@4332.68,1153.54 C144.1@4332.68,1221.46 v1(4374.02,1221.46) ; U18.5@4332.68,1395.67 C145.1@4332.68,1487.2 v1(4374.02,1487.2)
  Inner Layer 7 w19.68: v1(1660.43,1224.41) 1660.43,1260.83 1642.72,1278.54 1642.72,1435.04 1660.43,1452.76 v1(1660.43,1501.97)
  Bottom w9.84: C198.1@1660.43,1186.02 1660.43,1165.35 1675.2,1150.59 U35.14@1675.2,1130.91 ; C189.1@1660.43,1461.61 1665.35,1456.69 1665.35,1438.98 1675.2,1429.13 U33.14@1675.2,1409.45
  Bottom w11.81: v1(366.14,2065.94) C200.1@409.45,2065.94 409.45,2095.47 416.34,2102.36 U37.1@416.34,2125 ; U39.1@411.42,1619.09 C208.1@411.42,1559.06 412.4,1559.06 v1(452.76,1559.06) ; U42.1@426.18,822.83 C219.1@484.25,822.83 484.25,803.15 v1(468.5,787.4) ; v1(562.01,1937.01) C199.1@599.41,1937.01 U36.1@599.41,1996.06 ; U40.1@565.94,1175.2 624.02,1175.2 C214.1@625,1174.21 v1(625,1134.84) ; v1(676.18,1484.25) C207.1@727.36,1484.25 727.36,1502.95 728.35,1503.94 U38.1@728.35,1567.91 ; L16.2@1197.83,2102.36 L14.2@1247.05,2102.36 v1(1282.48,2102.36) ; C198.1@1660.43,1186.02 v1(1660.43,1224.41) ; C189.1@1660.43,1461.61 v1(1660.43,1501.97) ; R150.1@1990.16,526.57 v1(1990.16,578.74) ; R151.2@2045.28,526.57 v1(2045.28,578.74) ; PD5.1@3930.71,2244.09 3931.1,2244.49 v1(3931.1,2299.21)
  other v1: 3533.46,2450.79 3582.68,2470.47 3533.46,2490.16 3582.68,2509.84 3533.46,2529.53 3582.68,2549.21 3533.46,2568.9
3.3V_USB: C152.1 C153.1 C154.1 C155.1 C164.1 C167.1 C168.1 L17.1 R130.2 R133.2 R134.2 R135.1 R137.1 U22.12 U22.28 U22.32 U22.41 U22.54 U22.69 U23.1 U24.6 U25.1 U25.8 U26.5 | length 1809.3
  Top w7.87: v2(503.94,2576.77) 503.94,2596.46 527.56,2620.08 U22.69@553.15,2620.08 ; U22.54@635.83,2828.74 v1(635.83,2889.76) ; v2(761.81,2425.2) U22.12@761.81,2474.41 ; U22.41@840.55,2828.74 v1(840.55,2889.76) ; U22.28@907.48,2635.83 v1(984.25,2635.83) ; U22.32@907.48,2698.82 952.76,2698.82 v1(974.41,2720.47)
  Top w9.84: v1(520.67,2296.26) U25.8@555.12,2296.26 ; U25.1@665.35,2315.94 685.04,2315.94 698.82,2329.72 C168.1@717.52,2329.72
  Top w11.81: R137.1@142.72,2683.07 v1(142.72,2724.41) ; v1(255.91,2633.86) U24.6@303.15,2633.86 ; v1(358.27,2453.74) R134.2@395.67,2453.74 ; v1(358.27,2509.84) R133.2@395.67,2509.84 ; C168.1@717.52,2329.72 v1(757.87,2329.72) ; v1(799.21,2202.76) C167.1@799.21,2245.08 U26.5@799.21,2307.09
  Top w19.68: U23.1@573.82,2998.82 614.17,2998.82 627.17,3011.81 R135.1@657.48,3011.81 C164.1@746.06,3011.81 v1(746.06,2948.82)
  Inner Layer 3 w11.81: v1(142.72,2724.41) 142.72,2665.35 174.21,2633.86 v1(255.91,2633.86)
  Inner Layer 6 w11.81: v2(761.81,2425.2) 761.81,2389.76 757.87,2385.83 v1(757.87,2329.72) 799.21,2288.39 v1(799.21,2202.76)
  Bottom w11.81: v1(551.18,2411.42) 584.65,2444.88 R130.2@584.65,2466.54 ; C152.1@635.83,2842.52 v1(635.83,2889.76) ; v2(761.81,2425.2) 773.62,2437.01 C155.1@773.62,2460.63 ; C154.1@840.55,2842.52 v1(840.55,2889.76) ; C153.1@920.28,2655.51 964.57,2655.51 v1(984.25,2635.83)
  Bottom w19.68: v1(746.06,2948.82) 746.06,3011.22 L17.1@746.65,3011.81
3.3V_USB_F: C149.1 C150.1 C151.1 L17.2 U22.62 U22.66 | length 826.9
  Top w7.87: v2(421.26,2696.85) 443.9,2674.21 C151.1@443.9,2650.59 503.94,2650.59 520.67,2667.32 U22.66@553.15,2667.32 ; v2(503.94,2744.09) 517.72,2730.31 U22.62@553.15,2730.32
  Bottom w11.81: v2(421.26,2696.85) 421.26,2728.35 448.82,2755.91 492.13,2755.91 v2(503.94,2744.09) 527.56,2720.47 C150.1@563.98,2720.47 564.96,2721.46 564.96,2846.46 570.87,2852.36 v1(570.87,2921.26)
  Bottom w19.68: v1(570.87,2921.26) C149.1@570.87,3011.81 L17.2@676.57,3011.81
5.0V: C87.1 C92.1 C93.1 C94.1 C97.1 C98.1 C103.1 C104.1 C107.1 C108.1 C191.1 C192.1 C205.1 J4.97 J4.98 L2.2 L15.2 PD4.1 R65.1 R69.2 R74.2 R77.2 R80.2 R84.1 U5.5 U5.8 U6.1 U7.3 U7.8 U7.9 U7.10 U8.3 U8.8 U8.9 U8.10 U9.3 U9.8 U9.9 U9.10 U31.14 U32.20 U34.20 | length 2353.7
  Top w9.84: C191.1@2384.84,1929.13 2406.5,1929.13 2426.18,1909.45 U31.14@2445.87,1909.45 ; v1(4654.53,3029.53) 4691.93,2992.13 U6.1@4722.44,2992.13
  Top w11.81: U34.20@1019.49,771.65 1019.69,771.65 C205.1@1019.69,823.82 v1(1059.06,823.82) ; v1(1282.48,2043.31) 1287.4,2043.31 J4.97@1339.57,2043.31 ; J4.98@1495.08,2043.31 v1(1559.06,2043.31) ; C191.1@2384.84,1929.13 2384.84,2004.92 2409.45,2029.53 2532.48,2029.53 2608.27,2105.31 v1(2608.27,2490.16) ; v1(3830.71,2299.21) 3830.71,2485.24 3927.17,2581.69 v1(3927.17,2755.91) ; R65.1@4591.54,3157.48 v1(4591.54,3196.85) ; C92.1@4645.67,3157.48 v1(4645.67,3196.85) ; R69.2@4699.8,3157.48 v1(4699.8,3196.85)
  Top w19.68: v1(3844.49,2824.8) v1(3844.49,3080.71)
  Bottom w11.81: v1(744.09,822.83) C192.1@785.43,822.83 785.43,794.29 785.63,794.09 U32.20@785.63,771.65 ; L15.2@1144.69,2102.36 1144.69,2059.06 1167.32,2036.42 1242.13,2036.42 1249.02,2043.31 v1(1282.48,2043.31) ; PD4.1@3830.71,2244.09 v1(3830.71,2299.21)
  Bottom w19.68: U5.5@3844.49,3029.72 v1(3844.49,3080.71)
  other v1: 3750,551.18 3789.37,551.18 3750,590.55 3789.37,590.55 3750,629.92 3789.37,629.92 2529.53,2490.16 2568.9,2490.16 3188.98,2490.16 3228.35,2490.16 3267.72,2490.16 2096.46,2500 2755.91,2500 2096.46,2539.37 2529.53,2539.37 2568.9,2539.37 2608.27,2539.37 2755.91,2539.37 3188.98,2539.37 3228.35,2539.37 3267.72,2539.37 4537.4,2549.21 2096.46,2578.74 2135.83,2578.74 2175.2,2578.74 2755.91,2578.74 2795.28,2578.74 4537.4,2588.58 4537.4,2627.95 4537.4,2667.32 4537.4,2706.69 4537.4,2746.06 3966.54,2755.91 4005.91,2755.91 4537.4,2785.43 4005.91,2795.28 4005.91,2834.65
5V: R120.1 R121.1 R122.1 | length 340.6
  Top w11.81: R120.1@3267.72,1216.54 v1(3401.57,1216.54) ; R122.1@3363.19,1086.61 v1(3401.57,1086.61) ; R121.1@3363.19,1141.73 v1(3401.57,1141.73)
  Bottom w11.81: v1(3401.57,1086.61) v1(3401.57,1141.73) v1(3401.57,1216.54)
10MHZ_OUT: R147.2 U37.5 | length 131.7
  Top w5.91: R147.2@472.44,2281.5 472.44,2265.75 518.7,2265.75 532.48,2251.97 v1(532.48,2230.31)
  Bottom w5.91: U37.5@532.48,2201.77 v1(532.48,2230.31)
11V_ANA: C113.1 C114.1 C121.1 C130.1 C131.1 C170.1 C171.1 L10.2 PD9.1 R81.1 R85.1 R91.1 R142.1 U10.1 U12.5 U14.6 U29.6 | length 7784
  Top w19.68: v1(224.41,2015.75) R142.1@265.75,2015.75 ; U29.6@550.2,2089.57 C170.1@611.22,2089.57 627.95,2088.58 C171.1@689.96,2088.58 746.06,2088.58 v1(767.72,2110.24) ; v1(3313.98,1740.16) C121.1@3313.98,1694.88 U12.5@3381.89,1694.88 ; L10.2@3496.06,899.61 v1(3496.06,940.94) ; v1(4097.44,2675.2) 4097.44,2387.8 4172.24,2312.99 C130.1@4172.24,2089.57 ; v1(4110.24,2089.57) C130.1@4172.24,2089.57 ; U14.6@4172.24,1946.85 C131.1@4172.24,2011.81 C130.1@4172.24,2089.57 ; R91.1@4339.57,1816.93 v1(4339.57,1858.27)
  Inner Layer 3 w19.68: v1(224.41,2015.75) 254.92,1985.24 379.43,1985.24 380.41,1984.25 ; v1(767.72,2110.24) 673.23,2015.75 411.91,2015.75 380.41,1984.25 ; v1(3313.98,1740.16) 3296.26,1757.87 2422.24,1757.87 2399.61,1780.51 2360.24,1780.51 2282.48,1702.76 1889.76,1702.76 1859.25,1733.27 1678.15,1733.27 1599.41,1654.53 1076.77,1654.53 1043.31,1621.06 923.23,1621.06 877.95,1666.34 877.95,1766.73 804.13,1840.55 405.51,1840.55 380.41,1865.65 380.41,1984.25
  Bottom w19.68: v1(3496.06,940.94) 3496.06,1351.38 3313.98,1533.46 v1(3313.98,1740.16) 3338.58,1764.76 4016.73,1764.76 4110.24,1858.27 ; R85.1@4097.44,2616.14 v1(4097.44,2675.2) ; PD9.1@4330.71,2244.09 4330.71,2165.35 4254.92,2089.57 v1(4110.24,2089.57) 4110.24,1858.27 ; v1(4339.57,1858.27) 4110.24,1858.27
12.0V: C90.1 C91.1 C112.1 C117.1 J4.99 J4.100 L6.2 R64.1 U6.4 U6.5 U6.6 U6.13 U6.14 U6.15 U10.5 U10.8 | length 4271.8
  Top w9.84: U6.6@4722.44,2893.7 4690.94,2893.7 4690.94,2913.39 U6.5@4722.44,2913.39 ; U6.14@4872.05,2913.39 4902.56,2913.39 4902.56,2924.21 4893.7,2933.07 U6.15@4872.05,2933.07
  Top w11.81: J4.99@1339.57,2023.62 v1(1390.75,2023.62) ; v1(1443.9,2023.62) J4.100@1495.08,2023.62
  Top w19.68: v1(4454.72,3029.53) 4454.72,2937.01 v1(4468.5,2923.23)
  Inner Layer 3 w31.5: v1(1390.75,2023.62) v1(1443.9,2023.62) 1491.14,2023.62 1506.89,2007.87 1614.17,2007.87 1648.62,2042.32 1648.62,2119.09 1722.44,2192.91 4326.77,2192.91 4586.61,2452.76 v1(4586.61,2844.49)
  Bottom w19.68: U10.5@4378.94,3029.72 4379.13,3029.53 v1(4454.72,3029.53)
  other v1: 4507.87,2844.49 4547.24,2844.49 4468.5,2883.86 5009.84,2972.44 5049.21,2972.44 5088.58,2972.44 5127.95,2972.44
AS_CLK: R14.1 R56.2 U3.19 | length 631.1
  Top w5.91: R56.2@1192.91,1755.91 1192.91,1725.39 1245.08,1673.23 1537.4,1673.23 v1(1592.52,1618.11) U3.19@1592.52,1567.91 R14.1@1592.52,1461.61
AS_CSN: R58.2 U1.AE2 U3.22 | length 790.4
  Top w5.91: R58.2@1381.89,1755.91 1381.89,1752.95 1449.8,1685.04 1580.71,1685.04 1614.17,1651.57 v1(1669.29,1651.57) U3.22@1669.29,1567.91 1669.29,1535.43 1675.2,1529.53 1759.84,1529.53 1857.28,1626.97 1941.93,1626.97 U1.AE2@1960.63,1608.27
AS_D0: R48.2 U1.Y4 U3.2 | length 1031.4
  Top w5.91: v1(1685.04,1694.88) 1694.88,1704.72 U3.2@1694.88,1796.26
  Top w11.81: v2(2137.8,1549.21) U1.Y4@2157.48,1529.53
  Inner Layer 3 w5.91: v1(1685.04,1694.88) 1715.55,1694.88 1762.8,1647.64 2067.91,1647.64 2078.74,1636.81 2078.74,1578.74 2088.58,1568.9 2118.11,1568.9 v2(2137.8,1549.21)
  Bottom w5.91: R48.2@1362.2,1713.58 1393.7,1713.58 1437.01,1670.28 1635.83,1670.28 1660.43,1694.88 v1(1685.04,1694.88)
AS_D1: R51.2 U1.AD2 U3.1 | length 815.5
  Top w5.91: v1(1720.47,1651.57) U3.1@1720.47,1796.26
  Top w11.81: v2(1980.32,1627.95) U1.AD2@2000,1608.27
  Inner Layer 3 w5.91: v1(1720.47,1651.57) 1740.16,1631.89 1943.9,1631.89 1947.83,1627.95 v2(1980.32,1627.95)
  Bottom w5.91: R51.2@1362.2,1658.46 1640.75,1658.46 1655.51,1673.23 1698.82,1673.23 v1(1720.47,1651.57)
AS_D2: R53.2 U1.AC2 U3.23 | length 791.7
  Top w5.91: U3.23@1694.88,1567.91 v1(1694.88,1620.08)
  Top w11.81: v2(2019.69,1627.95) U1.AC2@2039.37,1608.27
  Inner Layer 3 w5.91: v1(1694.88,1620.08) 1938.98,1620.08 1950.79,1608.27 2000,1608.27 v2(2019.69,1627.95)
  Bottom w5.91: R53.2@1362.2,1520.67 1385.83,1520.67 1433.07,1567.91 1642.72,1567.91 v1(1694.88,1620.08)
AS_D3: R55.2 U1.AB3 U3.21 | length 832.7
  Top w5.91: U3.21@1643.7,1567.91 v1(1643.7,1620.08)
  Top w11.81: v2(2059.06,1588.58) U1.AB3@2078.74,1568.9
  Inner Layer 3 w5.91: v1(1643.7,1620.08) 1667.32,1596.46 1712.6,1596.46 1724.41,1608.27 1932.09,1608.27 1971.46,1568.9 2039.37,1568.9 v2(2059.06,1588.58)
  Bottom w5.91: R55.2@1362.2,1579.72 1603.35,1579.72 v1(1643.7,1620.08)
CC1: C161.1 J5.A5 U22.70 | length 909.6
  Top w5.91: v2(500,2548.23) 514.76,2548.23 524.61,2558.07 524.61,2598.43 530.51,2604.33 U22.70@553.15,2604.33
  Inner Layer 6 w5.91: v2(500,2548.23) 531.5,2548.23 563.98,2580.71 563.98,2860.24 v1(538.39,2885.83)
  Bottom w5.91: J5.A5@307.09,2861.81 307.09,2886.81 350.39,2930.12 C161.1@350.39,3017.72 377.95,3017.72 425.2,2970.47 453.74,2970.47 v1(538.39,2885.83)
CC2: C160.1 J5.B5 U22.67 | length 418.9
  Top w5.91: J5.B5@360.24,2831.1 360.24,2801.18 335.63,2776.57 C160.1@335.63,2732.28 335.63,2683.07 362.2,2656.5 362.2,2642.72 379.92,2625 497.05,2625 523.62,2651.57 U22.67@553.15,2651.57
CLK_25M: R40.2 U1.AF19 | length 418.2
  Top w5.91: R40.2@1730.32,635.83 v2(1763.78,635.83) ; v2(1901.57,919.29) U1.AF19@1921.26,938.98
  Inner Layer 5 w5.91: v2(1763.78,635.83) 1763.78,679.13 1921.26,836.61 1921.26,899.61 v2(1901.57,919.29)
CLK_OSC: R104.2 U1.A6 | length 1110.2
  Top w5.91: R104.2@3790.35,959.65 v1(3790.35,997.05)
  Top w11.81: U1.A6@2905.51,1450.79 v2(2925.2,1431.1)
  Inner Layer 3 w5.91: v2(2925.2,1431.1) 3031.5,1431.1 3051.18,1411.42 3375.98,1411.42 v1(3790.35,997.05)
CLK_OSC_EXT: J4.76 R106.2 | length 3535.4
  Top w5.91: J4.76@1495.08,2259.84 v1(1551.18,2259.84) ; v1(3830.71,997.05) R106.2@3884.84,997.05
  Inner Layer 3 w5.91: v1(1551.18,2259.84) 1611.22,2259.84 1628.94,2242.13 1845.47,2242.13 1851.38,2248.03 2358.27,2248.03 2399.61,2289.37 2468.5,2289.37 2498.03,2259.84 v1(3563.98,2259.84)
  Inner Layer 6 w5.91: v1(3563.98,2259.84) 3563.98,1822.83 3651.57,1735.24 3651.57,1176.18 v1(3830.71,997.05)
CLK_USR: R45.2 U1.AC13 | length 514.4
  Top w5.91: R45.2@1728.35,875 v1(1795.28,875) ; v2(2019.69,1155.51) U1.AC13@2039.37,1175.2
  Inner Layer 5 w5.91: v1(1795.28,875) 1854.33,934.06 1854.33,1068.9 1940.94,1155.51 v2(2019.69,1155.51)
CONF_DONE: Q5.1 R11.2 U1.AB1 | length 2147.1
  Top w5.91: U1.AB1@2078.74,1647.64 2029.53,1696.85 1947.83,1696.85 1929.13,1715.55 R11.2@1929.13,1837.6 1907.48,1837.6 1901.57,1843.5 1901.57,2069.88 2177.17,2345.47 2177.17,2438.98 2213.58,2475.39 v2(2213.58,2874.02) ; v2(2664.37,2937.01) Q5.1@2664.37,2980.31
  Inner Layer 3 w5.91: v2(2213.58,2874.02) 2249.02,2874.02 2261.81,2886.81 2261.81,2996.06 2271.16,3005.41 2624.51,3005.41 2664.37,2965.55 v2(2664.37,2937.01)
DAC_SPI_CLK: U1.A13 U11.6 | length 684.3
  Top w5.91: U1.A13@2905.51,1175.2 2944.88,1175.2 2992.13,1222.44 3158.46,1222.44 3207.68,1271.65 3251.97,1271.65 3346.46,1366.14 3346.46,1438.98 3346.46,1457.68 3322.83,1481.3 U11.6@3283.46,1481.3
DAC_SPI_CSN: U1.A12 U11.5 | length 599.4
  Top w5.91: U1.A12@2905.51,1214.57 2950.79,1214.57 2982.28,1246.06 3148.62,1246.06 3220.47,1317.91 3220.47,1489.17 3238.19,1506.89 U11.5@3283.46,1506.89
DAC_SPI_MOSI: U1.A11 U11.7 | length 711.2
  Top w5.91: U1.A11@2905.51,1253.94 2885.83,1234.25 2885.83,1207.68 2899.61,1193.9 2946.85,1193.9 2987.2,1234.25 3153.54,1234.25 3202.76,1283.46 3247.05,1283.46 3334.65,1371.06 3334.65,1443.9 3322.83,1455.71 U11.7@3283.46,1455.71
DCLS_IN0: U1.AE4 U41.18 | length 1321.9
  Top w5.91: v1(1161.42,1069.88) U41.18@1240.16,1069.88
  Top w11.81: v2(1940.94,1549.21) U1.AE4@1960.63,1529.53
  Inner Layer 4 w5.91: v1(1161.42,1069.88) 1302.17,1069.88 1318.9,1086.61 1318.9,1134.84 1285.43,1168.31 1285.43,1202.76 1318.9,1236.22 1318.9,1436.02 1367.13,1484.25 1569.88,1484.25 1621.06,1535.43 1868.11,1535.43 1874.02,1529.53 1921.26,1529.53 v2(1940.94,1549.21)
DCLS_IN1: U1.AE5 U41.16 | length 1337.5
  Top w5.91: v1(1161.42,1018.7) U41.16@1240.16,1018.7
  Top w11.81: v2(1940.94,1509.84) U1.AE5@1960.63,1490.16
  Inner Layer 4 w5.91: v1(1161.42,1018.7) 1294.29,1018.7 1330.71,1055.12 1330.71,1139.76 1297.24,1173.23 1297.24,1197.83 1330.71,1231.3 1330.71,1431.1 1372.05,1472.44 1827.76,1472.44 1845.47,1490.16 1921.26,1490.16 v2(1940.94,1509.84)
DCLS_IN2: U1.AE6 U41.14 | length 1331.8
  Top w5.91: v1(1161.42,967.52) U41.14@1240.16,967.52
  Top w11.81: v2(1940.94,1470.47) U1.AE6@1960.63,1450.79
  Inner Layer 4 w5.91: v1(1161.42,967.52) 1259.84,967.52 1342.52,1050.2 1342.52,1426.18 1376.97,1460.63 1832.68,1460.63 1843.5,1471.46 1872.05,1471.46 1892.72,1450.79 1921.26,1450.79 v2(1940.94,1470.47)